# EAGLE board panel (EAGLE 6.2)
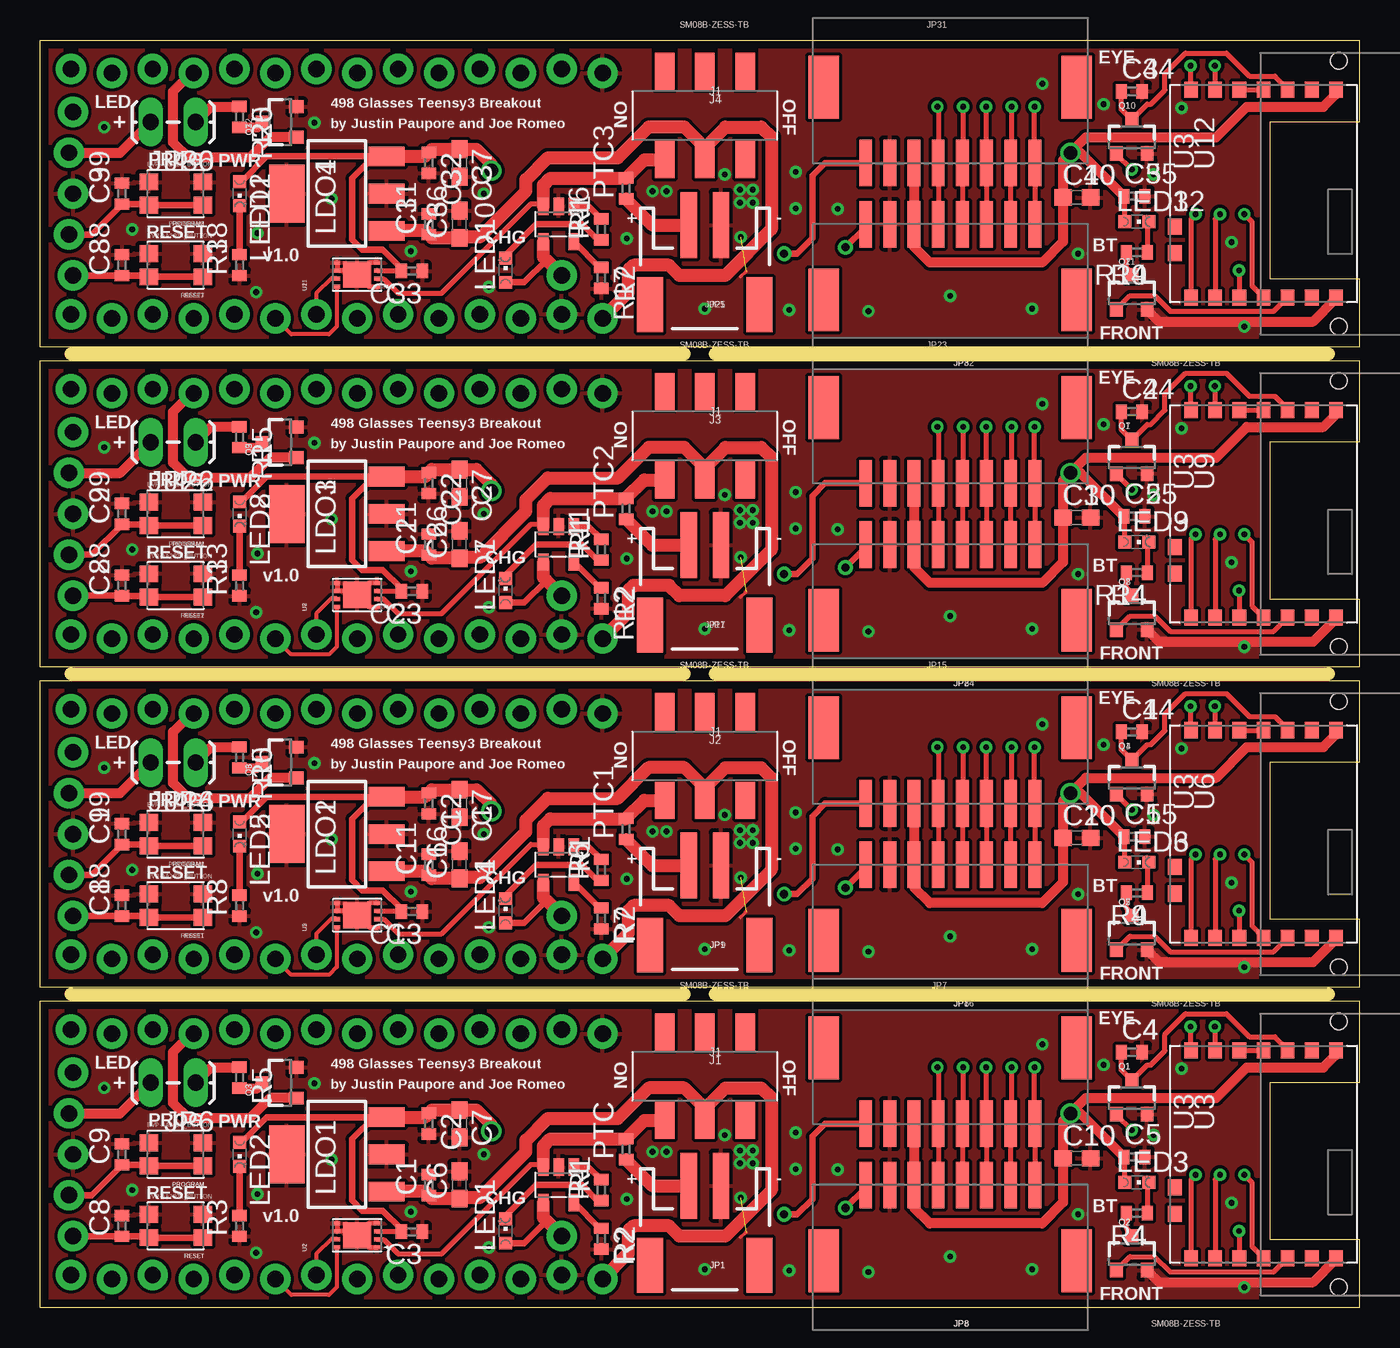
[diagram p0: board, top side]
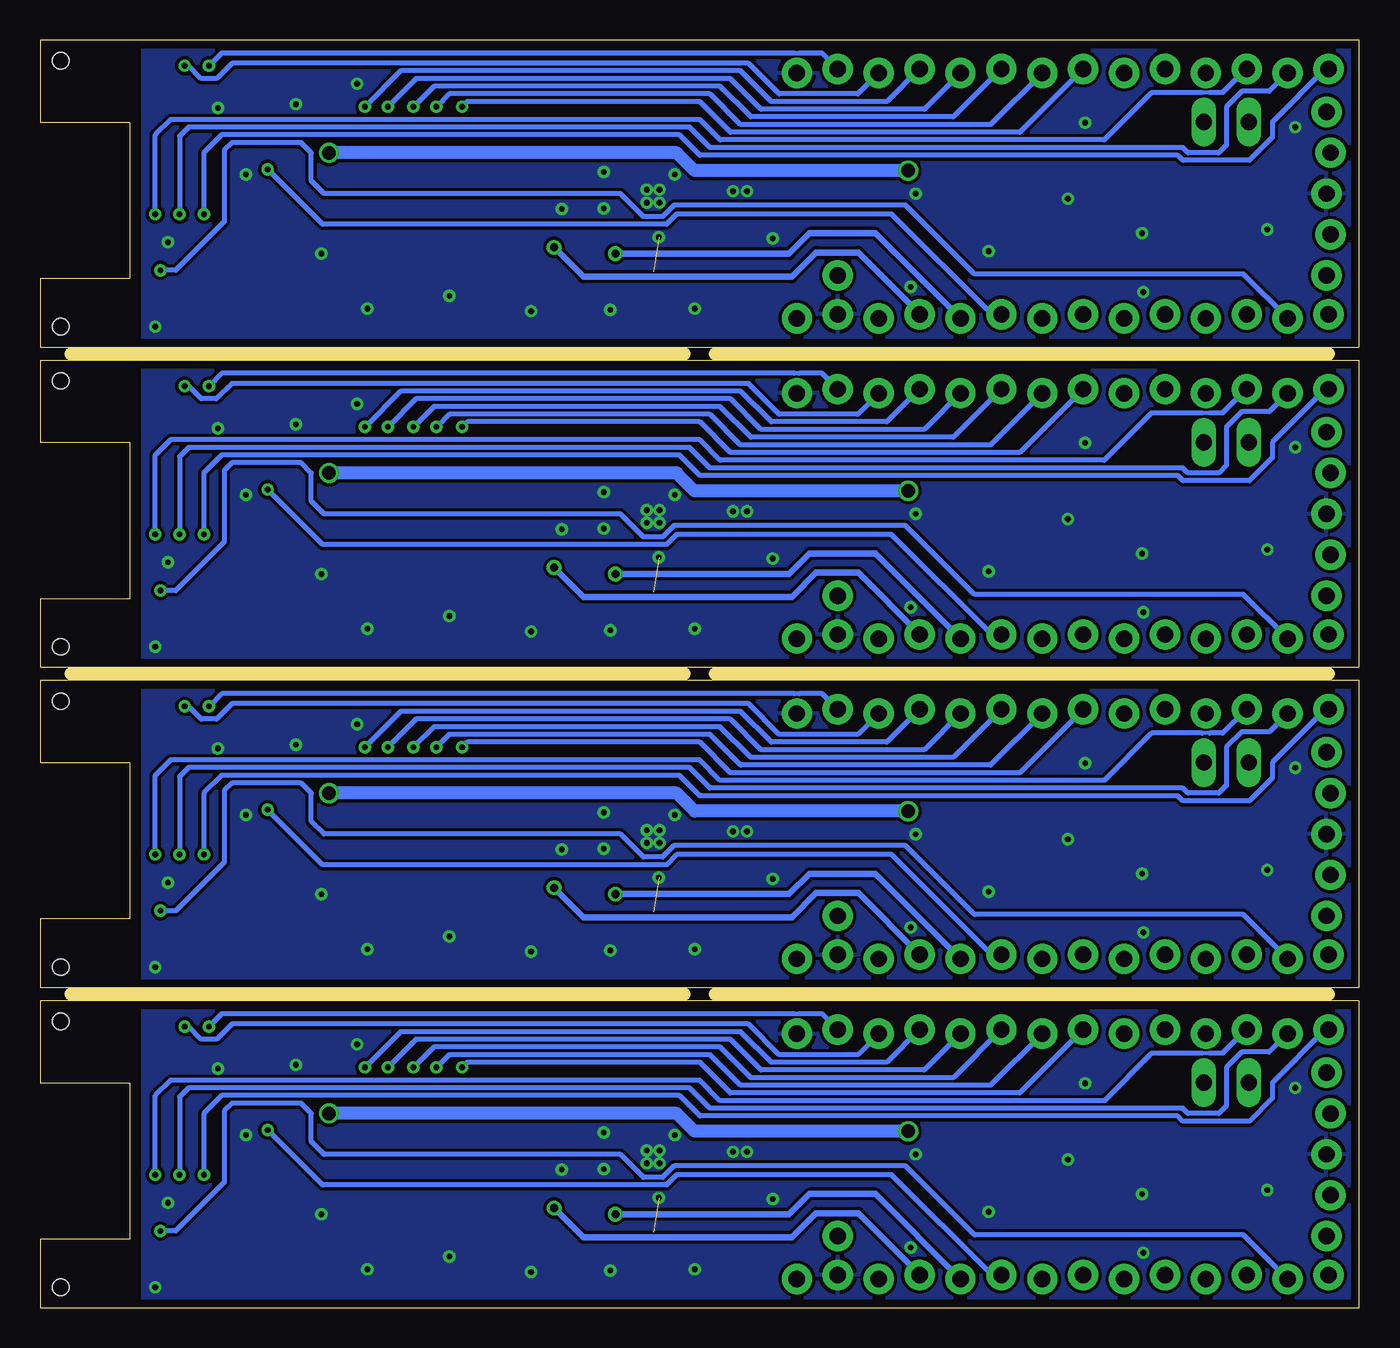
[diagram p1: board, bottom side, seen from below]

Size 81.92 x 78.71 mm. Coordinates in mm from the lower left corner, seen from the top.
Outline: 0,0 0,19.05 81.92,19.05 81.92,13.97 76.36,13.97 76.36,4.25 81.92,4.25 81.92,0 0,0
Outline: 0,19.89 0,38.94 81.92,38.94 81.92,33.86 76.36,33.86 76.36,24.14 81.92,24.14 81.92,19.89 0,19.89
Outline: 0,39.78 0,58.83 81.92,58.83 81.92,53.75 76.36,53.75 76.36,44.02 81.92,44.02 81.92,39.78 0,39.78
Outline: 0,59.66 0,78.72 81.92,78.72 81.92,73.64 76.36,73.64 76.36,63.91 81.92,63.91 81.92,59.66 0,59.66
Copper layers (1*16): Top 0.0178mm / dielectric 59mil / Bottom 0.0178mm
Design rules: minimum track width 6mil, minimum drill 14mil, track to track 6mil, track to pad 6mil, pad to pad 6mil, via to via 6mil, smd to smd 6mil, copper to edge 20mil, drill to drill 16mil, minimum pad ring 8mil, minimum via ring 8mil, stop-mask expansion 1mil, vias tented up to drill 20mil, thermal gap 10mil
Holes 1 mm at 80.64,1.27 80.64,17.78 80.64,21.16 80.64,37.67 80.64,41.05 80.64,57.56 80.64,60.93 80.64,77.44
Milling: 6 lines

## Footprints (pad centres in the part's own frame; a part is rotated, then mirrored left to right if it is on the bottom)
C0402 = smd 0.7 x 0.9: 1 -0.65,0; 2 0.65,0
C0603 = smd 1.1 x 1: 1 -0.85,0; 2 0.85,0
JS2020_6PIN_SMT = smd 1.2 x 2.3: P1 -2.5,1.25; P2 -2.5,-4.25; P3 0,1.25; P4 0,-4.25; P5 2.5,1.25; P6 2.5,-4.25
JST-2-SMD = smd 1 x 4.1: 1 -1,-3.45; 2 1,-3.45 | smd 1.6 x 3.4: NC1 -3.4,1.5; NC2 3.4,1.5
1X14_LOCK = drill 1.016 pad 1.88: 1 0,0.127; 2 2.54,-0.127; 3 5.08,0.127; 4 7.62,-0.127; 5 10.16,0.127; 6 12.7,-0.127; 7 15.24,0.127; 8 17.78,-0.127; 9 20.32,0.127; 10 22.86,-0.127; 11 25.4,0.127; 12 27.94,-0.127; 13 30.48,0.127; 14 33.02,-0.127
1X05_LOCK = drill 1.016 pad 1.88: 1 0,0.127; 2 2.54,-0.127; 3 5.08,0.127; 4 7.62,-0.127; 5 10.16,0.127
1X01 = drill 1.016 pad 1.88: 1 0,0
1X02_LOCK_LONGPADS = drill 1.016 long: 1 -0.127,0; 2 2.667,0
SM08B_8PIN_SMD = smd 1.9 x 3.9: MOUNT1 -7.85,-4.7; MOUNT2 7.85,-4.7 | smd 0.8 x 2.9: P1 -5.25,0; P2 -3.75,0; P3 -2.25,0; P4 -0.75,0; P5 0.75,0; P6 2.25,0; P7 3.75,0; P8 5.25,0
SOT223 = smd 1.219 x 2.235: 1 -2.311,-3.099; 2 0,-3.099; 3 2.311,-3.099 | smd 3.6 x 2.2: 4 0,3.099
CHIPLED_0603 = smd 0.8 x 0.8: A 0,-0.75; C 0,0.75
EVP-AA202K_4PIN = smd 1.15 x 1.05: A -1.675,0.725; A' 1.675,0.725; B -1.675,-0.725; B' 1.675,-0.725
R0402 = smd 0.7 x 0.9: 1 -0.65,0; 2 0.65,0
SOT23-3 = smd 0.8 x 0.9: 1 -0.95,-1; 2 0.95,-1; 3 0,1.1
SOT23-5 = smd 1.06 x 0.65: P1 -0.35,0.95; P2 -0.35,0; P3 -0.35,-0.95; P4 1.85,-0.95; P5 1.85,0.95
TDFN_8PIN = smd 1.63 x 1.75: EP 1,0 | smd 0.25 x 0.4: P1 0.25,-1.25; P2 0.75,-1.25; P3 1.25,-1.25; P4 1.75,-1.25; P5 1.75,1.25; P6 1.25,1.25; P7 0.75,1.25; P8 0.25,1.25
SPBT2632C2A_16PIN_SMD = smd 1 x 0.85: P1 -6.45,-1.3; P2 -6.45,-2.8; P3 -6.45,-4.3; P4 -6.45,-5.8; P5 -6.45,-7.3; P6 -6.45,-8.8; P7 -6.45,-10.3; P8 6.45,-10.3; P9 6.45,-8.8; P10 6.45,-7.3; P11 6.45,-5.8; P12 6.45,-4.3; P13 6.45,-2.8; P14 6.45,-1.3; P15 -2.05,-0.3; P16 -3.7,-0.3

## Placement (x,y rotation side)
C1  1uF  [C0402]  24.13,7.62 90 top
C2  1uF  [C0402]  24.13,11.43 270 top
C3  1uF  [C0402]  23.08,4.71 180 top
C4  0.1uF  [C0402]  67.79,15.88 0 top
C5  1uF  [C0402]  67.94,9.37 0 top
C6  10uF  [C0603]  26.04,7.62 90 top
C7  10uF  [C0603]  26.04,11.43 270 top
C8  0.1uF  [C0402]  5.08,5.08 90 top
C9  0.1uF  [C0402]  5.08,9.53 90 top
C10  10uF  [C0603]  64.37,9.29 0 top
C11  1uF  [C0402]  24.13,27.51 90 top
C12  1uF  [C0402]  24.13,31.32 270 top
C13  1uF  [C0402]  23.08,24.6 180 top
C14  0.1uF  [C0402]  67.79,35.76 0 top
C15  1uF  [C0402]  67.94,29.25 0 top
C16  10uF  [C0603]  26.04,27.51 90 top
C17  10uF  [C0603]  26.04,31.32 270 top
C18  0.1uF  [C0402]  5.08,24.97 90 top
C19  0.1uF  [C0402]  5.08,29.41 90 top
C20  10uF  [C0603]  64.37,29.18 0 top
C21  1uF  [C0402]  24.13,47.4 90 top
C22  1uF  [C0402]  24.13,51.21 270 top
C23  1uF  [C0402]  23.08,44.49 180 top
C24  0.1uF  [C0402]  67.79,55.65 0 top
C25  1uF  [C0402]  67.94,49.14 0 top
C26  10uF  [C0603]  26.04,47.4 90 top
C27  10uF  [C0603]  26.04,51.21 270 top
C28  0.1uF  [C0402]  5.08,44.86 90 top
C29  0.1uF  [C0402]  5.08,49.3 90 top
C30  10uF  [C0603]  64.37,49.06 0 top
C31  1uF  [C0402]  24.13,67.28 90 top
C32  1uF  [C0402]  24.13,71.09 270 top
C33  1uF  [C0402]  23.08,64.38 180 top
C34  0.1uF  [C0402]  67.79,75.54 0 top
C35  1uF  [C0402]  67.94,69.03 0 top
C36  10uF  [C0603]  26.04,67.28 90 top
C37  10uF  [C0603]  26.04,71.09 270 top
C38  0.1uF  [C0402]  5.08,64.74 90 top
C39  0.1uF  [C0402]  5.08,69.19 90 top
C40  10uF  [C0603]  64.37,68.95 0 top
J1  JS202011SCQN  [JS2020_6PIN_SMT]  41.27,15.88 0 top
J2  JS202011SCQN  [JS2020_6PIN_SMT]  41.27,35.76 0 top
J3  JS202011SCQN  [JS2020_6PIN_SMT]  41.27,55.65 0 top
J4  JS202011SCQN  [JS2020_6PIN_SMT]  41.27,75.54 0 top
JP1  [JST-2-SMD]  41.27,4.13 180 top
JP2  M14LOCK  [1X14_LOCK]  1.91,17.14 0 top
JP3  M14LOCK  [1X14_LOCK]  1.91,1.91 0 top
JP4  [1X05_LOCK]  1.91,14.61 270 top
JP5  M01PTH  [1X01]  32.38,4.45 0 top
JP6  LED  [1X02_LOCK_LONGPADS]  9.53,13.97 180 top
JP7  SM08B-ZESS-TB  [SM08B_8PIN_SMD]  56.52,11.43 180 top
JP8  SM08B-ZESS-TB  [SM08B_8PIN_SMD]  56.52,7.62 0 top
JP9  [JST-2-SMD]  41.27,24.02 180 top
JP10  M14LOCK  [1X14_LOCK]  1.91,37.03 0 top
JP11  M14LOCK  [1X14_LOCK]  1.91,21.79 0 top
JP12  [1X05_LOCK]  1.91,34.49 270 top
JP13  M01PTH  [1X01]  32.38,24.33 0 top
JP14  LED  [1X02_LOCK_LONGPADS]  9.53,33.86 180 top
JP15  SM08B-ZESS-TB  [SM08B_8PIN_SMD]  56.52,31.32 180 top
JP16  SM08B-ZESS-TB  [SM08B_8PIN_SMD]  56.52,27.51 0 top
JP17  [JST-2-SMD]  41.27,43.9 180 top
JP18  M14LOCK  [1X14_LOCK]  1.91,56.92 0 top
JP19  M14LOCK  [1X14_LOCK]  1.91,41.68 0 top
JP20  [1X05_LOCK]  1.91,54.38 270 top
JP21  M01PTH  [1X01]  32.38,44.22 0 top
JP22  LED  [1X02_LOCK_LONGPADS]  9.53,53.75 180 top
JP23  SM08B-ZESS-TB  [SM08B_8PIN_SMD]  56.52,51.21 180 top
JP24  SM08B-ZESS-TB  [SM08B_8PIN_SMD]  56.52,47.4 0 top
JP25  [JST-2-SMD]  41.27,63.79 180 top
JP26  M14LOCK  [1X14_LOCK]  1.91,76.81 0 top
JP27  M14LOCK  [1X14_LOCK]  1.91,61.57 0 top
JP28  [1X05_LOCK]  1.91,74.27 270 top
JP29  M01PTH  [1X01]  32.38,64.11 0 top
JP30  LED  [1X02_LOCK_LONGPADS]  9.53,73.63 180 top
JP31  SM08B-ZESS-TB  [SM08B_8PIN_SMD]  56.52,71.09 180 top
JP32  SM08B-ZESS-TB  [SM08B_8PIN_SMD]  56.52,67.28 0 top
LDO1  TC1262  [SOT223]  18.41,9.53 90 top
LDO2  TC1262  [SOT223]  18.41,29.41 90 top
LDO3  TC1262  [SOT223]  18.41,49.3 90 top
LDO4  TC1262  [SOT223]  18.41,69.19 90 top
LED1  RED  [CHIPLED_0603]  28.89,4.76 0 top
LED2  GREEN  [CHIPLED_0603]  12.38,9.53 180 top
LED3  BLUE  [CHIPLED_0603]  68.1,7.78 270 top
LED4  RED  [CHIPLED_0603]  28.89,24.65 0 top
LED5  GREEN  [CHIPLED_0603]  12.38,29.41 180 top
LED6  BLUE  [CHIPLED_0603]  68.1,27.67 270 top
LED7  RED  [CHIPLED_0603]  28.89,44.54 0 top
LED8  GREEN  [CHIPLED_0603]  12.38,49.3 180 top
LED9  BLUE  [CHIPLED_0603]  68.1,47.56 270 top
LED10  RED  [CHIPLED_0603]  28.89,64.43 0 top
LED11  GREEN  [CHIPLED_0603]  12.38,69.19 180 top
LED12  BLUE  [CHIPLED_0603]  68.1,67.44 270 top
PROGRAM  EVP-AA202K_BUTTON  [EVP-AA202K_4PIN]  8.41,9.53 180 top
PROGRAM1  EVP-AA202K_BUTTON  [EVP-AA202K_4PIN]  8.41,29.41 180 top
PROGRAM2  EVP-AA202K_BUTTON  [EVP-AA202K_4PIN]  8.41,49.3 180 top
PROGRAM3  EVP-AA202K_BUTTON  [EVP-AA202K_4PIN]  8.41,69.19 180 top
PTC  500mA  [R0402]  36.39,9.84 90 top
PTC1  500mA  [R0402]  36.39,29.73 90 top
PTC2  500mA  [R0402]  36.39,49.62 90 top
PTC3  500mA  [R0402]  36.39,69.51 90 top
Q1  2N7002  [SOT23-3]  67.79,13.02 0 top
Q2  2N7002  [SOT23-3]  67.79,3.33 0 top
Q3  2N7002  [SOT23-3]  14.92,13.97 90 top
Q4  2N7002  [SOT23-3]  67.79,32.91 0 top
Q5  2N7002  [SOT23-3]  67.79,23.22 0 top
Q6  2N7002  [SOT23-3]  14.92,33.86 90 top
Q7  2N7002  [SOT23-3]  67.79,52.79 0 top
Q8  2N7002  [SOT23-3]  67.79,43.11 0 top
Q9  2N7002  [SOT23-3]  14.92,53.75 90 top
Q10  2N7002  [SOT23-3]  67.79,72.68 0 top
Q11  2N7002  [SOT23-3]  67.79,63 0 top
Q12  2N7002  [SOT23-3]  14.92,73.63 90 top
R1  150  [R0402]  34.85,7.3 90 top
R2  4.7K  [R0402]  34.85,4.29 270 top
R3  56  [R0402]  12.38,5.08 90 top
R4  56  [R0402]  68.1,5.87 180 top
R5  DNI  [R0402]  12.38,14.29 270 top
R6  150  [R0402]  34.85,27.19 90 top
R7  4.7K  [R0402]  34.85,24.17 270 top
R8  56  [R0402]  12.38,24.97 90 top
R9  56  [R0402]  68.1,25.76 180 top
R10  DNI  [R0402]  12.38,34.18 270 top
R11  150  [R0402]  34.85,47.08 90 top
R12  4.7K  [R0402]  34.85,44.06 270 top
R13  56  [R0402]  12.38,44.86 90 top
R14  56  [R0402]  68.1,45.65 180 top
R15  DNI  [R0402]  12.38,54.06 270 top
R16  150  [R0402]  34.85,66.97 90 top
R17  4.7K  [R0402]  34.85,63.95 270 top
R18  56  [R0402]  12.38,64.74 90 top
R19  56  [R0402]  68.1,65.54 180 top
R20  DNI  [R0402]  12.38,73.95 270 top
RESET  EVP-AA202K_BUTTON  [EVP-AA202K_4PIN]  8.41,5.08 180 top
RESET1  EVP-AA202K_BUTTON  [EVP-AA202K_4PIN]  8.41,24.97 180 top
RESET2  EVP-AA202K_BUTTON  [EVP-AA202K_4PIN]  8.41,44.86 180 top
RESET3  EVP-AA202K_BUTTON  [EVP-AA202K_4PIN]  8.41,64.74 180 top
U1  MCP73831-SOT5  [SOT23-5]  32.19,8.38 270 top
U2  MAX17040-TDFN  [TDFN_8PIN]  19.68,3.49 90 top
U3  SPBT2632C2A  [SPBT2632C2A_16PIN_SMD]  70.17,9.53 90 top
U4  MCP73831-SOT5  [SOT23-5]  32.19,28.27 270 top
U5  MAX17040-TDFN  [TDFN_8PIN]  19.68,23.38 90 top
U6  SPBT2632C2A  [SPBT2632C2A_16PIN_SMD]  70.17,29.41 90 top
U7  MCP73831-SOT5  [SOT23-5]  32.19,48.16 270 top
U8  MAX17040-TDFN  [TDFN_8PIN]  19.68,43.27 90 top
U9  SPBT2632C2A  [SPBT2632C2A_16PIN_SMD]  70.17,49.3 90 top
U10  MCP73831-SOT5  [SOT23-5]  32.19,68.05 270 top
U11  MAX17040-TDFN  [TDFN_8PIN]  19.68,63.16 90 top
U12  SPBT2632C2A  [SPBT2632C2A_16PIN_SMD]  70.17,69.19 90 top

## Library data of the parts
C1-C40 PTC PTC1-PTC3 R1-R20 = resistor
J1-J4 JP7 JP8 JP15 JP16 JP23 JP24 JP31 JP32 LDO1-LDO4 PROGRAM PROGRAM1-PROGRAM3 RESET RESET1-RESET3 U1-U12 = glasses
JP1-JP6 JP9-JP14 JP17-JP22 JP25-JP30 Q1-Q12 = SparkFun
LED1-LED12 = led

## Nets
+3V1: JP12.2 JP14.2
+3V2: JP20.2 JP22.2
+3V3: JP4.2 JP6.2
+3V4: JP28.2 JP30.2
BT_RESET: JP3.9 Q1.1
BT_RESET1: JP11.9 Q4.1
BT_RESET2: JP19.9 Q7.1
BT_RESET3: JP27.9 Q10.1
GND: C1.2 C2.2 C3.1 C4.2 C5.2 C6.2 C7.2 C8.2 C9.2 C10.2 JP1.1 JP2.14 JP3.13 JP4.3 JP7.P7 JP8.P2 LDO1.2 LDO1.4 PROGRAM.B PROGRAM.B' Q1.2 Q2.2 Q3.2 R2.2 R3.1 RESET.B RESET.B' U1.P2 U2.EP U2.P1 U2.P4 U2.P5 U2.P6 U3.P7
GND1: C11.2 C12.2 C13.1 C14.2 C15.2 C16.2 C17.2 C18.2 C19.2 C20.2 JP9.1 JP10.14 JP11.13 JP12.3 JP15.P7 JP16.P2 LDO2.2 LDO2.4 PROGRAM1.B PROGRAM1.B' Q4.2 Q5.2 Q6.2 R7.2 R8.1 RESET1.B RESET1.B' U4.P2 U5.EP U5.P1 U5.P4 U5.P5 U5.P6 U6.P7
GND2: C21.2 C22.2 C23.1 C24.2 C25.2 C26.2 C27.2 C28.2 C29.2 C30.2 JP17.1 JP18.14 JP19.13 JP20.3 JP23.P7 JP24.P2 LDO3.2 LDO3.4 PROGRAM2.B PROGRAM2.B' Q7.2 Q8.2 Q9.2 R12.2 R13.1 RESET2.B RESET2.B' U7.P2 U8.EP U8.P1 U8.P4 U8.P5 U8.P6 U9.P7
GND3: C31.2 C32.2 C33.1 C34.2 C35.2 C36.2 C37.2 C38.2 C39.2 C40.2 JP25.1 JP26.14 JP27.13 JP28.3 JP31.P7 JP32.P2 LDO4.2 LDO4.4 PROGRAM3.B PROGRAM3.B' Q10.2 Q11.2 Q12.2 R17.2 R18.1 RESET3.B RESET3.B' U10.P2 U11.EP U11.P1 U11.P4 U11.P5 U11.P6 U12.P7
I2C_SCL: JP3.7 U2.P7
I2C_SCL1: JP11.7 U5.P7
I2C_SCL2: JP19.7 U8.P7
I2C_SCL3: JP27.7 U11.P7
I2C_SDA: JP3.6 U2.P8
I2C_SDA1: JP11.6 U5.P8
I2C_SDA2: JP19.6 U8.P8
I2C_SDA3: JP27.6 U11.P8
INCP: JP2.10 JP7.P2 JP8.P7
INCP1: JP10.10 JP15.P2 JP16.P7
INCP2: JP18.10 JP23.P2 JP24.P7
INCP3: JP26.10 JP31.P2 JP32.P7
INCV: JP2.8 JP7.P4 JP8.P5
INCV1: JP10.8 JP15.P4 JP16.P5
INCV2: JP18.8 JP23.P4 JP24.P5
INCV3: JP26.8 JP31.P4 JP32.P5
INPHI: JP2.7 JP7.P5 JP8.P4
INPHI1: JP10.7 JP15.P5 JP16.P4
INPHI2: JP18.7 JP23.P5 JP24.P4
INPHI3: JP26.7 JP31.P5 JP32.P4
IR_LED: JP2.4 Q3.1
IR_LED1: JP10.4 Q6.1
IR_LED2: JP18.4 Q9.1
IR_LED3: JP26.4 Q12.1
N$1: LED1.C R1.1
N$2: R1.2 U1.P1
N$3: R2.1 U1.P5
N$4: JP1.2 PTC.1
N$5: LED2.C R3.2
N$6: U3.P11 U3.P12
N$7: C4.1 Q1.3 U3.P10
N$8: Q2.1 U3.P5
N$9: LED3.C R4.1
N$10: Q2.3 R4.2
N$11: JP6.1 R5.1
N$12: Q3.3 R5.2
N$13: U6.P11 U6.P12
N$14: C14.1 Q4.3 U6.P10
N$15: Q5.1 U6.P5
N$16: LED6.C R9.1
N$17: Q5.3 R9.2
N$18: JP14.1 R10.1
N$19: Q6.3 R10.2
N$20: R6.2 U4.P1
N$21: R7.1 U4.P5
N$22: JP9.2 PTC1.1
N$23: LED5.C R8.2
N$24: LED4.C R6.1
N$25: U9.P11 U9.P12
N$26: C24.1 Q7.3 U9.P10
N$27: Q8.1 U9.P5
N$28: LED9.C R14.1
N$29: Q8.3 R14.2
N$30: JP22.1 R15.1
N$31: Q9.3 R15.2
N$32: R11.2 U7.P1
N$33: R12.1 U7.P5
N$34: JP17.2 PTC2.1
N$35: LED8.C R13.2
N$36: LED7.C R11.1
N$37: U12.P11 U12.P12
N$38: C34.1 Q10.3 U12.P10
N$39: Q11.1 U12.P5
N$40: LED12.C R19.1
N$41: Q11.3 R19.2
N$42: JP30.1 R20.1
N$43: Q12.3 R20.2
N$44: R16.2 U10.P1
N$45: R17.1 U10.P5
N$46: JP25.2 PTC3.1
N$47: LED11.C R18.2
N$48: LED10.C R16.1
PIXEL_EYE: JP3.10 JP7.P8
PIXEL_EYE1: JP11.10 JP15.P8
PIXEL_EYE2: JP19.10 JP23.P8
PIXEL_EYE3: JP27.10 JP31.P8
PIXEL_FRONT: JP3.11 JP8.P1
PIXEL_FRONT1: JP11.11 JP16.P1
PIXEL_FRONT2: JP19.11 JP24.P1
PIXEL_FRONT3: JP27.11 JP32.P1
RESP: JP2.11 JP7.P1 JP8.P8
RESP1: JP10.11 JP15.P1 JP16.P8
RESP2: JP18.11 JP23.P1 JP24.P8
RESP3: JP26.11 JP31.P1 JP32.P8
RESV: JP2.9 JP7.P3 JP8.P6
RESV1: JP10.9 JP15.P3 JP16.P6
RESV2: JP18.9 JP23.P3 JP24.P6
RESV3: JP26.9 JP31.P3 JP32.P6
SPI_CS: JP2.3 U3.P4
SPI_CS1: JP10.3 U6.P4
SPI_CS2: JP18.3 U9.P4
SPI_CS3: JP26.3 U12.P4
SPI_MISO: JP2.1 U3.P1
SPI_MISO1: JP10.1 U6.P1
SPI_MISO2: JP18.1 U9.P1
SPI_MISO3: JP26.1 U12.P1
SPI_MOSI: JP2.2 U3.P2
SPI_MOSI1: JP10.2 U6.P2
SPI_MOSI2: JP18.2 U9.P2
SPI_MOSI3: JP26.2 U12.P2
SPI_SCK: JP3.2 U3.P3
SPI_SCK1: JP11.2 U6.P3
SPI_SCK2: JP19.2 U9.P3
SPI_SCK3: JP27.2 U12.P3
TS_GP1: JP10.6
TS_GP2: JP10.5
TS_GP3: JP11.8
TS_GP4: JP11.5
TS_GP5: JP11.3
TS_GP6: JP11.1
TS_GP7: JP2.6
TS_GP8: JP2.5
TS_GP9: JP11.4
TS_GP10: JP18.6
TS_GP11: JP18.5
TS_GP12: JP19.8
TS_GP13: JP3.1
TS_GP14: JP19.5
TS_GP15: JP3.3
TS_GP16: JP3.4
TS_GP17: JP3.5
TS_GP18: JP19.3
TS_GP19: JP19.1
TS_GP20: JP3.8
TS_GP21: JP19.4
TS_GP22: JP26.6
TS_GP23: JP26.5
TS_GP24: JP27.8
TS_GP25: JP27.5
TS_GP26: JP27.3
TS_GP27: JP27.1
TS_GP28: JP27.4
TS_PROG: C9.1 JP4.4 PROGRAM.A PROGRAM.A'
TS_PROG1: C19.1 JP12.4 PROGRAM1.A PROGRAM1.A'
TS_PROG2: C29.1 JP20.4 PROGRAM2.A PROGRAM2.A'
TS_PROG3: C39.1 JP28.4 PROGRAM3.A PROGRAM3.A'
TS_RESET: C8.1 JP4.5 RESET.A RESET.A'
TS_RESET1: C18.1 JP12.5 RESET1.A RESET1.A'
TS_RESET2: C28.1 JP20.5 RESET2.A RESET2.A'
TS_RESET3: C38.1 JP28.5 RESET3.A RESET3.A'
TS_VBAT: JP4.1
TS_VBAT1: JP12.1
TS_VBAT2: JP20.1
TS_VBAT3: JP28.1
UART1_RXD: JP2.13 U3.P14
UART1_RXD1: JP10.13 U6.P14
UART1_RXD2: JP18.13 U9.P14
UART1_RXD3: JP26.13 U12.P14
UART1_TXD: JP2.12 U3.P13
UART1_TXD1: JP10.12 U6.P13
UART1_TXD2: JP18.12 U9.P13
UART1_TXD3: JP26.12 U12.P13
VBAT: J1.P2 PTC.2 U1.P3 U2.P2
VBAT1: J2.P2 PTC1.2 U4.P3 U5.P2
VBAT2: J3.P2 PTC2.2 U7.P3 U8.P2
VBAT3: J4.P2 PTC3.2 U10.P3 U11.P2
VCC: JP3.12
VCC1: JP11.12
VCC2: JP19.12
VCC3: JP27.12
VCCIO: C2.1 C3.2 C5.1 C7.1 C10.1 JP7.P6 JP8.P3 LDO1.3 LED2.A LED3.A U2.P3 U3.P8
VCCIO1: C12.1 C13.2 C15.1 C17.1 C20.1 JP15.P6 JP16.P3 LDO2.3 LED5.A LED6.A U5.P3 U6.P8
VCCIO2: C22.1 C23.2 C25.1 C27.1 C30.1 JP23.P6 JP24.P3 LDO3.3 LED8.A LED9.A U8.P3 U9.P8
VCCIO3: C32.1 C33.2 C35.1 C37.1 C40.1 JP31.P6 JP32.P3 LDO4.3 LED11.A LED12.A U11.P3 U12.P8
VIN: C1.1 C6.1 J1.P4 JP3.14 LDO1.1
VIN1: C11.1 C16.1 J2.P4 JP11.14 LDO2.1
VIN2: C21.1 C26.1 J3.P4 JP19.14 LDO3.1
VIN3: C31.1 C36.1 J4.P4 JP27.14 LDO4.1
VUSB: JP5.1 LED1.A U1.P4
VUSB1: JP13.1 LED4.A U4.P4
VUSB2: JP21.1 LED7.A U7.P4
VUSB3: JP29.1 LED10.A U10.P4

## Tracks (layer width: path | path; a pad name or v marks a point on that pad's centre or on a via)
+3V1
  Top 0.61: JP12.2 4.95,31.95 JP14.2
+3V2
  Top 0.61: JP20.2 4.95,51.84 JP22.2
+3V3
  Top 0.61: JP4.2 4.95,12.06 JP6.2
+3V4
  Top 0.61: JP28.2 4.95,71.73 JP30.2
BT_RESET  (via drill 0.36)
  Top 0.305: Q1.1 66.84,11.98 v67.79,11.03
  Bottom 0.305: JP3.9 22.83,2.03 29.05,8.26 42.39,8.26 43.02,7.62 64.37,7.62 v67.79,11.03
BT_RESET1  (via drill 0.36)
  Top 0.305: Q4.1 66.84,31.87 v67.79,30.92
  Bottom 0.305: JP11.9 22.83,21.92 29.05,28.14 42.39,28.14 43.02,27.51 64.37,27.51 v67.79,30.92
BT_RESET2  (via drill 0.36)
  Top 0.305: Q7.1 66.84,51.76 v67.79,50.81
  Bottom 0.305: JP19.9 22.83,41.81 29.05,48.03 42.39,48.03 43.02,47.4 64.37,47.4 v67.79,50.81
BT_RESET3  (via drill 0.36)
  Top 0.305: Q10.1 66.84,71.65 v67.79,70.7
  Bottom 0.305: JP27.9 22.83,61.7 29.05,67.92 42.39,67.92 43.02,67.28 64.37,67.28 v67.79,70.7
GND  (via drill 0.36)  (1 unrouted)
  Top 0.229: 43.5,4.37 43.81,4.68
  Top 0.305: U2.EP 19.68,4.74 U2.P6 U2.P5 | U2.P4 20.43,5.24 U2.EP | U2.EP 20.43,3.74 U2.P1
  Top 0.406: 80.47,3 U3.P7
  Top 0.61: Q2.2 69.48,1.59 79.06,1.59 80.47,3
  other vias: 43.5,6.83 23.02,5.95 27.54,9.53 36.43,6.75 56.52,3.17 61.59,2.38 51.44,2.22 13.49,7.06 18.1,9.21 3.97,13.65 5.71,7.3 38.89,9.68 70.88,14.84 13.41,3.41 27.86,3.73 46.91,10.87 46.91,8.61 46.51,2.3 41.27,2.38 62.23,16.35 66.04,15.08 43.46,9.76 44.25,9.76 43.46,8.97 44.25,8.97 42.51,10.72 17.03,13.93 64.45,5.79 74.77,1.27 69.14,10.72 73.98,6.51 38.02,9.68 49.53,8.57
  pour Bottom (isolate 0.203): 0,0 0,19.05 75.56,19.05 75.56,0
  pour Top (isolate 0.203, rank 6): 0,0 0,19.05 75.56,19.05 75.56,0
GND1  (via drill 0.36)  (1 unrouted)
  Top 0.229: 43.5,24.25 43.81,24.57
  Top 0.305: U5.EP 19.68,24.63 U5.P6 U5.P5 | U5.P4 20.43,25.13 U5.EP | U5.EP 20.43,23.63 U5.P1
  Top 0.406: 80.47,22.89 U6.P7
  Top 0.61: Q5.2 69.48,21.48 79.06,21.48 80.47,22.89
  other vias: 43.5,26.71 23.02,25.84 27.54,29.41 36.43,26.64 56.52,23.06 61.59,22.27 51.44,22.11 13.49,26.95 18.1,29.1 3.97,33.54 5.71,27.19 38.89,29.57 70.88,34.73 13.41,23.3 27.86,23.62 46.91,30.76 46.91,28.5 46.51,22.19 41.27,22.27 62.23,36.24 66.04,34.97 43.46,29.65 44.25,29.65 43.46,28.86 44.25,28.86 42.51,30.6 17.03,33.82 64.45,25.68 74.77,21.16 69.14,30.6 73.98,26.4 38.02,29.57 49.53,28.46
  pour Bottom (isolate 0.203): 0,19.89 0,38.94 75.56,38.94 75.56,19.89
  pour Top (isolate 0.203, rank 6): 0,19.89 0,38.94 75.56,38.94 75.56,19.89
GND2  (via drill 0.36)  (1 unrouted)
  Top 0.229: 43.5,44.14 43.81,44.46
  Top 0.305: U8.EP 19.68,44.52 U8.P6 U8.P5 | U8.P4 20.43,45.02 U8.EP | U8.EP 20.43,43.52 U8.P1
  Top 0.406: 80.47,42.77 U9.P7
  Top 0.61: Q8.2 69.48,41.36 79.06,41.36 80.47,42.77
  other vias: 43.5,46.6 23.02,45.73 27.54,49.3 36.43,46.52 56.52,42.95 61.59,42.16 51.44,42 13.49,46.84 18.1,48.98 3.97,53.43 5.71,47.08 38.89,49.46 70.88,54.62 13.41,43.19 27.86,43.51 46.91,50.65 46.91,48.39 46.51,42.08 41.27,42.16 62.23,56.13 66.04,54.86 43.46,49.54 44.25,49.54 43.46,48.75 44.25,48.75 42.51,50.49 17.03,53.71 64.45,45.57 74.77,41.05 69.14,50.49 73.98,46.29 38.02,49.46 49.53,48.35
  pour Bottom (isolate 0.203): 0,39.78 0,58.83 75.56,58.83 75.56,39.78
  pour Top (isolate 0.203, rank 6): 0,39.78 0,58.83 75.56,58.83 75.56,39.78
GND3  (via drill 0.36)  (1 unrouted)
  Top 0.229: 43.5,64.03 43.81,64.35
  Top 0.305: U11.EP 19.68,64.41 U11.P6 U11.P5 | U11.P4 20.43,64.91 U11.EP | U11.EP 20.43,63.41 U11.P1
  Top 0.406: 80.47,62.66 U12.P7
  Top 0.61: Q11.2 69.48,61.25 79.06,61.25 80.47,62.66
  other vias: 43.5,66.49 23.02,65.62 27.54,69.19 36.43,66.41 56.52,62.84 61.59,62.05 51.44,61.89 13.49,66.73 18.1,68.87 3.97,73.32 5.71,66.97 38.89,69.35 70.88,74.51 13.41,63.08 27.86,63.4 46.91,70.54 46.91,68.28 46.51,61.97 41.27,62.05 62.23,76.02 66.04,74.75 43.46,69.43 44.25,69.43 43.46,68.63 44.25,68.63 42.51,70.38 17.03,73.59 64.45,65.46 74.77,60.93 69.14,70.38 73.98,66.17 38.02,69.35 49.53,68.24
  pour Bottom (isolate 0.203): 0,59.66 0,78.71 75.56,78.71 75.56,59.66
  pour Top (isolate 0.203, rank 6): 0,59.66 0,78.71 75.56,78.71 75.56,59.66
I2C_SCL
  Top 0.254: U2.P7 18.39,4.29 18.1,4.29 17.14,3.33 JP3.7
I2C_SCL1
  Top 0.254: U5.P7 18.39,24.17 18.1,24.17 17.14,23.22 JP11.7
I2C_SCL2
  Top 0.254: U8.P7 18.39,44.06 18.1,44.06 17.14,43.11 JP19.7
I2C_SCL3
  Top 0.254: U11.P7 18.39,63.95 18.1,63.95 17.14,63 JP27.7
I2C_SDA
  Top 0.254: U2.P8 18.41,3.72 18.41,1.27 17.94,0.79 15.59,0.79 JP3.6
I2C_SDA1
  Top 0.254: U5.P8 18.41,23.61 18.41,21.16 17.94,20.68 15.59,20.68 JP11.6
I2C_SDA2
  Top 0.254: U8.P8 18.41,43.5 18.41,41.05 17.94,40.57 15.59,40.57 JP19.6
I2C_SDA3
  Top 0.254: U11.P8 18.41,63.39 18.41,60.94 17.94,60.46 15.59,60.46 JP27.6
INCP  (via drill 0.36)
  Top 0.305: JP8.P7 JP7.P2 60.33,11.43 v60.33,14.92
  Bottom 0.305: JP2.10 27.02,14.76 37.15,14.76 39.05,16.67 58.58,16.67 v60.33,14.92
INCP1  (via drill 0.36)
  Top 0.305: JP16.P7 JP15.P2 60.33,31.32 v60.33,34.81
  Bottom 0.305: JP10.10 27.02,34.65 37.15,34.65 39.05,36.56 58.58,36.56 v60.33,34.81
INCP2  (via drill 0.36)
  Top 0.305: JP24.P7 JP23.P2 60.33,51.21 v60.33,54.7
  Bottom 0.305: JP18.10 27.02,54.54 37.15,54.54 39.05,56.45 58.58,56.45 v60.33,54.7
INCP3  (via drill 0.36)
  Top 0.305: JP32.P7 JP31.P2 60.33,71.09 v60.33,74.59
  Bottom 0.305: JP26.10 27.02,74.43 37.15,74.43 39.05,76.33 58.58,76.33 v60.33,74.59
INCV  (via drill 0.36)
  Top 0.305: JP8.P5 JP7.P4 57.31,11.47 v57.31,14.92
  Bottom 0.305: JP2.8 22.89,13.81 38.42,13.81 40.32,15.72 56.52,15.72 v57.31,14.92
INCV1  (via drill 0.36)
  Top 0.305: JP16.P5 JP15.P4 57.31,31.36 v57.31,34.81
  Bottom 0.305: JP10.8 22.89,33.7 38.42,33.7 40.32,35.6 56.52,35.6 v57.31,34.81
INCV2  (via drill 0.36)
  Top 0.305: JP24.P5 JP23.P4 57.31,51.25 v57.31,54.7
  Bottom 0.305: JP18.8 22.89,53.59 38.42,53.59 40.32,55.49 56.52,55.49 v57.31,54.7
INCV3  (via drill 0.36)
  Top 0.305: JP32.P5 JP31.P4 57.31,71.14 v57.31,74.59
  Bottom 0.305: JP26.8 22.89,73.48 38.42,73.48 40.32,75.38 56.52,75.38 v57.31,74.59
INPHI  (via drill 0.36)
  Top 0.305: JP8.P4 JP7.P5 55.77,14.88 v55.72,14.92
  Bottom 0.305: JP2.7 21.08,13.34 39.05,13.34 40.96,15.24 55.4,15.24 v55.72,14.92
INPHI1  (via drill 0.36)
  Top 0.305: JP16.P4 JP15.P5 55.77,34.77 v55.72,34.81
  Bottom 0.305: JP10.7 21.08,33.22 39.05,33.22 40.96,35.13 55.4,35.13 v55.72,34.81
INPHI2  (via drill 0.36)
  Top 0.305: JP24.P4 JP23.P5 55.77,54.66 v55.72,54.7
  Bottom 0.305: JP18.7 21.08,53.11 39.05,53.11 40.96,55.02 55.4,55.02 v55.72,54.7
INPHI3  (via drill 0.36)
  Top 0.305: JP32.P4 JP31.P5 55.77,74.54 v55.72,74.59
  Bottom 0.305: JP26.7 21.08,73 39.05,73 40.96,74.91 55.4,74.91 v55.72,74.59
IR_LED
  Top 0.61: Q3.1 14.29,13.02 13.02,11.75 9.21,11.75 8.26,12.7 8.26,15.88 9.4,17.02 JP2.4
IR_LED1
  Top 0.61: Q6.1 14.29,32.91 13.02,31.64 9.21,31.64 8.26,32.59 8.26,35.76 9.4,36.91 JP10.4
IR_LED2
  Top 0.61: Q9.1 14.29,52.8 13.02,51.52 9.21,51.52 8.26,52.48 8.26,55.65 9.4,56.79 JP18.4
IR_LED3
  Top 0.61: Q12.1 14.29,72.69 13.02,71.41 9.21,71.41 8.26,72.36 8.26,75.54 9.4,76.68 JP26.4
N$1
  Top 0.406: LED1.C 28.89,5.71 30.8,7.62 33.66,7.62 34.62,6.65 R1.1
N$2
  Top 0.406: R1.2 34.07,8.73 U1.P1
N$3
  Top 0.406: U1.P5 34.74,4.94 R2.1
N$4
  Top 0.813: PTC.1 38,7.58 JP1.2
N$5
  Top 0.406: LED2.C R3.2
N$6
  Top 0.305: U3.P12 U3.P11
N$7
  Top 0.305: C4.1 67.14,14.77 Q1.3 68.75,15.08 68.98,15.08 69.85,15.95 69.85,16.99 71.12,18.26 73.66,18.26 75.09,16.83 76.68,16.83 77.47,16.04 U3.P10
N$8
  Top 0.305: Q2.1 67.68,3.17 69.22,3.17 70.17,2.22 76.6,2.22 77.45,3.08 U3.P5
N$9
  Top 0.305: LED3.C 68.75,7.68 R4.1
N$10
  Top 0.305: Q2.3 67.79,4.6 67.45,4.94 R4.2
N$11
  Top 0.61: JP6.1 10.62,14.94 R5.1
N$12
  Top 0.61: R5.2 13.49,13.64 Q3.3
N$13
  Top 0.305: U6.P12 U6.P11
N$14
  Top 0.305: C14.1 67.14,34.66 Q4.3 68.75,34.97 68.98,34.97 69.85,35.84 69.85,36.87 71.12,38.14 73.66,38.14 75.09,36.72 76.68,36.72 77.47,35.92 U6.P10
N$15
  Top 0.305: Q5.1 67.68,23.06 69.22,23.06 70.17,22.11 76.6,22.11 77.45,22.96 U6.P5
N$16
  Top 0.305: LED6.C 68.75,27.57 R9.1
N$17
  Top 0.305: Q5.3 67.79,24.49 67.45,24.82 R9.2
N$18
  Top 0.61: JP14.1 10.62,34.83 R10.1
N$19
  Top 0.61: R10.2 13.49,33.53 Q6.3
N$20
  Top 0.406: R6.2 34.07,28.62 U4.P1
N$21
  Top 0.406: U4.P5 34.74,24.82 R7.1
N$22
  Top 0.813: PTC1.1 38,27.47 JP9.2
N$23
  Top 0.406: LED5.C R8.2
N$24
  Top 0.406: LED4.C 28.89,25.6 30.8,27.51 33.66,27.51 34.62,26.54 R6.1
N$25
  Top 0.305: U9.P12 U9.P11
N$26
  Top 0.305: C24.1 67.14,54.54 Q7.3 68.75,54.86 68.98,54.86 69.85,55.73 69.85,56.76 71.12,58.03 73.66,58.03 75.09,56.6 76.68,56.6 77.47,55.81 U9.P10
N$27
  Top 0.305: Q8.1 67.68,42.95 69.22,42.95 70.17,42 76.6,42 77.45,42.85 U9.P5
N$28
  Top 0.305: LED9.C 68.75,47.45 R14.1
N$29
  Top 0.305: Q8.3 67.79,44.38 67.45,44.71 R14.2
N$30
  Top 0.61: JP22.1 10.62,54.71 R15.1
N$31
  Top 0.61: R15.2 13.49,53.41 Q9.3
N$32
  Top 0.406: R11.2 34.07,48.51 U7.P1
N$33
  Top 0.406: U7.P5 34.74,44.71 R12.1
N$34
  Top 0.813: PTC2.1 38,47.35 JP17.2
N$35
  Top 0.406: LED8.C R13.2
N$36
  Top 0.406: LED7.C 28.89,45.49 30.8,47.4 33.66,47.4 34.62,46.43 R11.1
N$37
  Top 0.305: U12.P12 U12.P11
N$38
  Top 0.305: C34.1 67.14,74.43 Q10.3 68.75,74.75 68.98,74.75 69.85,75.62 69.85,76.65 71.12,77.92 73.66,77.92 75.09,76.49 76.68,76.49 77.47,75.7 U12.P10
N$39
  Top 0.305: Q11.1 67.68,62.84 69.22,62.84 70.17,61.89 76.6,61.89 77.45,62.74 U12.P5
N$40
  Top 0.305: LED12.C 68.75,67.34 R19.1
N$41
  Top 0.305: Q11.3 67.79,64.27 67.45,64.6 R19.2
N$42
  Top 0.61: JP30.1 10.62,74.6 R20.1
N$43
  Top 0.61: R20.2 13.49,73.3 Q12.3
N$44
  Top 0.406: R16.2 34.07,68.4 U10.P1
N$45
  Top 0.406: U10.P5 34.74,64.6 R17.1
N$46
  Top 0.813: PTC3.1 38,67.24 JP25.2
N$47
  Top 0.406: LED11.C R18.2
N$48
  Top 0.406: LED10.C 28.89,65.38 30.8,67.28 33.66,67.28 34.62,66.32 R16.1
PIXEL_EYE  (via drill 0.51)
  Top 0.406: JP7.P8 48.74,11.43 47.94,10.64 47.94,6.75 46.99,5.79 v46.2,5.79
  Bottom 0.406: JP3.10 30.05,7.06 34.13,7.06 35.4,5.79 v46.2,5.79
PIXEL_EYE1  (via drill 0.51)
  Top 0.406: JP15.P8 48.74,31.32 47.94,30.52 47.94,26.64 46.99,25.68 v46.2,25.68
  Bottom 0.406: JP11.10 30.05,26.95 34.13,26.95 35.4,25.68 v46.2,25.68
PIXEL_EYE2  (via drill 0.51)
  Top 0.406: JP23.P8 48.74,51.21 47.94,50.41 47.94,46.52 46.99,45.57 v46.2,45.57
  Bottom 0.406: JP19.10 30.05,46.84 34.13,46.84 35.4,45.57 v46.2,45.57
PIXEL_EYE3  (via drill 0.51)
  Top 0.406: JP31.P8 48.74,71.09 47.94,70.3 47.94,66.41 46.99,65.46 v46.2,65.46
  Bottom 0.406: JP27.10 30.05,66.73 34.13,66.73 35.4,65.46 v46.2,65.46
PIXEL_FRONT  (via drill 0.51)
  Top 0.406: JP8.P1 51.27,7.45 v50.01,6.19
  Bottom 0.406: v50.01,6.19 48.18,4.37 35.24,4.37 33.73,5.87 31.11,5.87 27.3,2.06 JP3.11
PIXEL_FRONT1  (via drill 0.51)
  Top 0.406: JP16.P1 51.27,27.34 v50.01,26.08
  Bottom 0.406: v50.01,26.08 48.18,24.25 35.24,24.25 33.73,25.76 31.11,25.76 27.3,21.95 JP11.11
PIXEL_FRONT2  (via drill 0.51)
  Top 0.406: JP24.P1 51.27,47.23 v50.01,45.97
  Bottom 0.406: v50.01,45.97 48.18,44.14 35.24,44.14 33.73,45.65 31.11,45.65 27.3,41.84 JP19.11
PIXEL_FRONT3  (via drill 0.51)
  Top 0.406: JP32.P1 51.27,67.11 v50.01,65.86
  Bottom 0.406: v50.01,65.86 48.18,64.03 35.24,64.03 33.73,65.54 31.11,65.54 27.3,61.73 JP27.11
RESP  (via drill 0.36)
  Top 0.305: JP8.P8 JP7.P1 61.75,11.44 v61.75,14.92
  Bottom 0.305: JP2.11 29.34,15.24 36.51,15.24 38.42,17.14 59.53,17.14 v61.75,14.92
RESP1  (via drill 0.36)
  Top 0.305: JP16.P8 JP15.P1 61.75,31.33 v61.75,34.81
  Bottom 0.305: JP10.11 29.34,35.13 36.51,35.13 38.42,37.03 59.53,37.03 v61.75,34.81
RESP2  (via drill 0.36)
  Top 0.305: JP24.P8 JP23.P1 61.75,51.22 v61.75,54.7
  Bottom 0.305: JP18.11 29.34,55.02 36.51,55.02 38.42,56.92 59.53,56.92 v61.75,54.7
RESP3  (via drill 0.36)
  Top 0.305: JP32.P8 JP31.P1 61.75,71.11 v61.75,74.59
  Bottom 0.305: JP26.11 29.34,74.91 36.51,74.91 38.42,76.81 59.53,76.81 v61.75,74.59
RESV  (via drill 0.36)
  Top 0.305: JP8.P6 JP7.P3 58.74,11.43 v58.74,14.92
  Bottom 0.305: JP2.9 25.21,14.29 37.78,14.29 39.69,16.19 57.47,16.19 v58.74,14.92
RESV1  (via drill 0.36)
  Top 0.305: JP16.P6 JP15.P3 58.74,31.32 v58.74,34.81
  Bottom 0.305: JP10.9 25.21,34.18 37.78,34.18 39.69,36.08 57.47,36.08 v58.74,34.81
RESV2  (via drill 0.36)
  Top 0.305: JP24.P6 JP23.P3 58.74,51.21 v58.74,54.7
  Bottom 0.305: JP18.9 25.21,54.06 37.78,54.06 39.69,55.97 57.47,55.97 v58.74,54.7
RESV3  (via drill 0.36)
  Top 0.305: JP32.P6 JP31.P3 58.74,71.09 v58.74,74.59
  Bottom 0.305: JP26.9 25.21,73.95 37.78,73.95 39.69,75.86 57.47,75.86 v58.74,74.59
SPI_CS  (via drill 0.36)
  Top 0.305: 75.97,3.25 U3.P4 75.25,3.81 75.25,7.78 v74.77,8.26
  Bottom 0.254: 9.29,15.8 9.76,15.8
  Bottom 0.305: v74.77,8.26 74.77,13.18 73.82,14.13 40.96,14.13 39.69,12.86 15.84,12.86 12.91,15.8 9.76,15.8 | JP2.3 7.02,17.27 8.49,15.8 9.29,15.8
SPI_CS1  (via drill 0.36)
  Top 0.305: 75.97,23.14 U6.P4 75.97,22.98 75.25,23.7 75.25,27.67 v74.77,28.14
  Bottom 0.254: 9.29,35.68 9.76,35.68
  Bottom 0.305: v74.77,28.14 74.77,33.06 73.82,34.02 40.96,34.02 39.69,32.75 15.84,32.75 12.91,35.68 9.76,35.68 | JP10.3 7.02,37.16 8.49,35.68 9.29,35.68
SPI_CS2  (via drill 0.36)
  Top 0.305: 75.97,43.02 U9.P4 75.97,42.87 75.25,43.59 75.25,47.55 v74.77,48.03
  Bottom 0.254: 9.29,55.57 9.76,55.57
  Bottom 0.305: v74.77,48.03 74.77,52.95 73.82,53.91 40.96,53.91 39.69,52.63 15.84,52.63 12.91,55.57 9.76,55.57 | JP18.3 7.02,57.05 8.49,55.57 9.29,55.57
SPI_CS3  (via drill 0.36)
  Top 0.305: 75.97,62.91 U12.P4 75.97,62.76 75.25,63.48 75.25,67.44 v74.77,67.92
  Bottom 0.254: 9.29,75.46 9.76,75.46
  Bottom 0.305: v74.77,67.92 74.77,72.84 73.82,73.79 40.96,73.79 39.69,72.52 15.84,72.52 12.91,75.46 9.76,75.46 | JP26.3 7.02,76.94 8.49,75.46 9.29,75.46
SPI_MISO  (via drill 0.36)
  Top 0.305: v71.75,8.26 71.47,7.97 U3.P1
  Bottom 0.305: JP2.1 2.1,17.27 5.4,13.97 5.4,13.02 6.83,11.59 10.95,11.59 11.27,11.91 40.96,11.91 42.23,13.18 70.64,13.18 71.75,12.06 v71.75,8.26
SPI_MISO1  (via drill 0.36)
  Top 0.305: v71.75,28.14 71.47,27.86 U6.P1
  Bottom 0.305: JP10.1 2.1,37.16 5.4,33.86 5.4,32.91 6.83,31.48 10.95,31.48 11.27,31.79 40.96,31.79 42.23,33.06 70.64,33.06 71.75,31.95 v71.75,28.14
SPI_MISO2  (via drill 0.36)
  Top 0.305: v71.75,48.03 71.47,47.74 U9.P1
  Bottom 0.305: JP18.1 2.1,57.05 5.4,53.75 5.4,52.79 6.83,51.37 10.95,51.37 11.27,51.68 40.96,51.68 42.23,52.95 70.64,52.95 71.75,51.84 v71.75,48.03
SPI_MISO3  (via drill 0.36)
  Top 0.305: v71.75,67.92 71.47,67.63 U12.P1
  Bottom 0.305: JP26.1 2.1,76.94 5.4,73.64 5.4,72.68 6.83,71.25 10.95,71.25 11.27,71.57 40.96,71.57 42.23,72.84 70.64,72.84 71.75,71.73 v71.75,67.92
SPI_MOSI  (via drill 0.36)
  Top 0.305: 73.03,3.08 U3.P2 72.97,7.96 v73.26,8.26
  Bottom 0.305: JP2.2 5.59,15.88 7.3,15.88 8.26,14.92 8.26,12.54 8.73,12.06 10.64,12.06 10.95,12.38 40.32,12.38 41.59,13.65 72.71,13.65 73.26,13.1 v73.26,8.26
SPI_MOSI1  (via drill 0.36)
  Top 0.305: 73.03,22.96 U6.P2 72.97,27.85 v73.26,28.14
  Bottom 0.305: JP10.2 5.59,35.76 7.3,35.76 8.26,34.81 8.26,32.43 8.73,31.95 10.64,31.95 10.95,32.27 40.32,32.27 41.59,33.54 72.71,33.54 73.26,32.98 v73.26,28.14
SPI_MOSI2  (via drill 0.36)
  Top 0.305: 73.03,42.85 U9.P2 72.97,47.74 v73.26,48.03
  Bottom 0.305: JP18.2 5.59,55.65 7.3,55.65 8.26,54.7 8.26,52.32 8.73,51.84 10.64,51.84 10.95,52.16 40.32,52.16 41.59,53.43 72.71,53.43 73.26,52.87 v73.26,48.03
SPI_MOSI3  (via drill 0.36)
  Top 0.305: 73.03,62.74 U12.P2 72.97,67.62 v73.26,67.92
  Bottom 0.305: JP26.2 5.59,75.54 7.3,75.54 8.26,74.59 8.26,72.21 8.73,71.73 10.64,71.73 10.95,72.05 40.32,72.05 41.59,73.32 72.71,73.32 73.26,72.76 v73.26,67.92
SPI_SCK  (via drill 0.36)
  Top 0.305: v74.45,4.76 74.45,3.09 U3.P3
  Bottom 0.305: JP3.2 7.19,4.52 23.89,4.52 28.18,8.81 42.55,8.81 43.26,8.1 44.45,8.1 45.88,9.53 64.29,9.53 65.09,10.32 65.09,12.06 65.72,12.7 70.01,12.7 70.48,12.22 70.48,7.78 73.5,4.76 v74.45,4.76
SPI_SCK1  (via drill 0.36)
  Top 0.305: v74.45,24.65 74.45,22.98 U6.P3
  Bottom 0.305: JP11.2 7.19,24.41 23.89,24.41 28.18,28.7 42.55,28.7 43.26,27.98 44.45,27.98 45.88,29.41 64.29,29.41 65.09,30.21 65.09,31.95 65.72,32.59 70.01,32.59 70.48,32.11 70.48,27.67 73.5,24.65 v74.45,24.65
SPI_SCK2  (via drill 0.36)
  Top 0.305: v74.45,44.54 74.45,42.87 U9.P3
  Bottom 0.305: JP19.2 7.19,44.3 23.89,44.3 28.18,48.59 42.55,48.59 43.26,47.87 44.45,47.87 45.88,49.3 64.29,49.3 65.09,50.09 65.09,51.84 65.72,52.48 70.01,52.48 70.48,52 70.48,47.55 73.5,44.54 v74.45,44.54
SPI_SCK3  (via drill 0.36)
  Top 0.305: v74.45,64.43 74.45,62.75 U12.P3
  Bottom 0.305: JP27.2 7.19,64.19 23.89,64.19 28.18,68.47 42.55,68.47 43.26,67.76 44.45,67.76 45.88,69.19 64.29,69.19 65.09,69.98 65.09,71.73 65.72,72.36 70.01,72.36 70.48,71.89 70.48,67.44 73.5,64.43 v74.45,64.43
TS_PROG
  Top 0.406: JP4.4 3.19,6.99 C9.1 6.66,8.88 PROGRAM.A' PROGRAM.A
TS_PROG1
  Top 0.406: JP12.4 3.19,26.87 C19.1 6.66,28.76 PROGRAM1.A' PROGRAM1.A
TS_PROG2
  Top 0.406: JP20.4 3.19,46.76 C29.1 6.66,48.65 PROGRAM2.A' PROGRAM2.A
TS_PROG3
  Top 0.406: JP28.4 3.19,66.65 C39.1 6.66,68.54 PROGRAM3.A' PROGRAM3.A
TS_RESET
  Top 0.406: JP4.5 5.07,4.45 C8.1 6.66,4.43 RESET.A' RESET.A
TS_RESET1
  Top 0.406: JP12.5 5.07,24.33 C18.1 6.66,24.32 RESET1.A' RESET1.A
TS_RESET2
  Top 0.406: JP20.5 5.07,44.22 C28.1 6.66,44.21 RESET2.A' RESET2.A
TS_RESET3
  Top 0.406: JP28.5 5.07,64.11 C38.1 6.66,64.09 RESET3.A' RESET3.A
UART1_RXD  (via drill 0.36)
  Top 0.254: 71.44,15.97 U3.P14
  Top 0.305: v71.44,17.46 71.44,15.97
  Bottom 0.279: 34.77,18.26 35.08,18.26
  Bottom 0.305: JP2.13 33.37,18.26 34.77,18.26 | 35.08,18.26 70.64,18.26 v71.44,17.46
UART1_RXD1  (via drill 0.36)
  Top 0.254: 71.44,35.86 U6.P14
  Top 0.305: v71.44,37.35 71.44,35.86
  Bottom 0.279: 34.77,38.14 35.08,38.14
  Bottom 0.305: JP10.13 33.37,38.14 34.77,38.14 | 35.08,38.14 70.64,38.14 v71.44,37.35
UART1_RXD2  (via drill 0.36)
  Top 0.254: 71.44,55.75 U9.P14
  Top 0.305: v71.44,57.24 71.44,55.75
  Bottom 0.279: 34.77,58.03 35.08,58.03
  Bottom 0.305: JP18.13 33.37,58.03 34.77,58.03 | 35.08,58.03 70.64,58.03 v71.44,57.24
UART1_RXD3  (via drill 0.36)
  Top 0.254: 71.44,75.64 U12.P14
  Top 0.305: v71.44,77.13 71.44,75.64
  Bottom 0.279: 34.77,77.92 35.08,77.92
  Bottom 0.305: JP26.13 33.37,77.92 34.77,77.92 | 35.08,77.92 70.64,77.92 v71.44,77.13
UART1_TXD  (via drill 0.36)
  Top 0.305: v72.95,17.46 72.95,16 U3.P13
  Bottom 0.305: JP2.12 31.15,15.72 36.04,15.72 37.94,17.62 70.01,17.62 70.96,16.67 71.91,16.67 72.71,17.46 v72.95,17.46
UART1_TXD1  (via drill 0.36)
  Top 0.305: v72.95,37.35 72.95,35.88 U6.P13
  Bottom 0.305: JP10.12 31.15,35.6 36.04,35.6 37.94,37.51 70.01,37.51 70.96,36.56 71.91,36.56 72.71,37.35 v72.95,37.35
UART1_TXD2  (via drill 0.36)
  Top 0.305: v72.95,57.24 72.95,55.77 U9.P13
  Bottom 0.305: JP18.12 31.15,55.49 36.04,55.49 37.94,57.4 70.01,57.4 70.96,56.45 71.91,56.45 72.71,57.24 v72.95,57.24
UART1_TXD3  (via drill 0.36)
  Top 0.305: v72.95,77.13 72.95,75.66 U12.P13
  Bottom 0.305: JP26.12 31.15,75.38 36.04,75.38 37.94,77.29 70.01,77.29 70.96,76.33 71.91,76.33 72.71,77.13 v72.95,77.13
VBAT
  Top 0.305: U2.P2 21.32,4.24 22.23,3.33 24.92,3.33 30.48,8.89 31.09,8.89 U1.P3
  Top 0.813: U1.P3 31.24,10.05 31.67,10.48 36.37,10.48 PTC.2 37.52,11.62 J1.P2
VBAT1
  Top 0.305: U5.P2 21.32,24.13 22.23,23.22 24.92,23.22 30.48,28.78 31.09,28.78 U4.P3
  Top 0.813: U4.P3 31.24,29.94 31.67,30.37 36.37,30.37 PTC1.2 37.52,31.51 J2.P2
VBAT2
  Top 0.305: U8.P2 21.32,44.02 22.23,43.11 24.92,43.11 30.48,48.67 31.09,48.67 U7.P3
  Top 0.813: U7.P3 31.24,49.83 31.67,50.25 36.37,50.25 PTC2.2 37.52,51.4 J3.P2
VBAT3
  Top 0.305: U11.P2 21.32,63.91 22.23,63 24.92,63 30.48,68.56 31.09,68.56 U10.P3
  Top 0.813: U10.P3 31.24,69.72 31.67,70.14 36.37,70.14 PTC3.2 37.52,71.29 J4.P2
VCCIO  (via drill 0.84)
  Top 0.305: U2.P3 22.41,4.74 C3.2 | LED3.A 67.35,9.31 C5.1
  Top 0.406: LED2.A 12.5,10.28 14.06,11.84 LDO1.3 20.73,11.84 19.37,10.48 19.37,6.67 20,6.03 21.27,6.03 22.43,4.87 C3.2 | 80.47,15.7 U3.P8
  Top 0.61: 80.47,15.7 79.69,14.92 74.93,14.92 73.03,13.02 64.93,13.02 v63.98,12.06 | JP7.P6 JP8.P3 54.27,6.22 55.24,5.24 62.23,5.24 63.52,6.53 C10.1 63.52,11.61 v63.98,12.06 | v63.98,12.06 64.6,12.06 C5.1
  Top 0.813: LDO1.3 23.89,11.84 C2.1 24.33,12.28 C7.1 27.09,12.28 28.02,11.35 v28.02,10.95
  Bottom 0.813: v28.02,10.95 41.27,10.95 42.39,12.06 v63.98,12.06
VCCIO1  (via drill 0.84)
  Top 0.305: U5.P3 22.41,24.63 C13.2 | LED6.A 67.35,29.2 C15.1
  Top 0.406: LED5.A 12.5,30.16 14.06,31.73 LDO2.3 20.73,31.73 19.37,30.37 19.37,26.56 20,25.92 21.27,25.92 22.43,24.76 C13.2 | 80.47,35.59 U6.P8
  Top 0.61: 80.47,35.59 79.69,34.81 74.93,34.81 73.03,32.91 64.93,32.91 v63.98,31.95 | JP15.P6 JP16.P3 54.27,26.11 55.24,25.13 62.23,25.13 63.52,26.42 C20.1 63.52,31.5 v63.98,31.95 | v63.98,31.95 64.6,31.95 C15.1
  Top 0.813: LDO2.3 23.89,31.73 C12.1 24.33,32.17 C17.1 27.09,32.17 28.02,31.24 v28.02,30.84
  Bottom 0.813: v28.02,30.84 41.27,30.84 42.39,31.95 v63.98,31.95
VCCIO2  (via drill 0.84)
  Top 0.305: U8.P3 22.41,44.52 C23.2 | LED9.A 67.35,49.08 C25.1
  Top 0.406: LED8.A 12.5,50.05 14.06,51.61 LDO3.3 20.73,51.61 19.37,50.25 19.37,46.44 20,45.81 21.27,45.81 22.43,44.65 C23.2 | 80.47,55.47 U9.P8
  Top 0.61: 80.47,55.47 79.69,54.7 74.93,54.7 73.03,52.79 64.93,52.79 v63.98,51.84 | JP23.P6 JP24.P3 54.27,45.99 55.24,45.02 62.23,45.02 63.52,46.31 C30.1 63.52,51.39 v63.98,51.84 | v63.98,51.84 64.6,51.84 C25.1
  Top 0.813: LDO3.3 23.89,51.61 C22.1 24.33,52.06 C27.1 27.09,52.06 28.02,51.13 v28.02,50.73
  Bottom 0.813: v28.02,50.73 41.27,50.73 42.39,51.84 v63.98,51.84
VCCIO3  (via drill 0.84)
  Top 0.305: U11.P3 22.41,64.41 C33.2 | LED12.A 67.35,68.97 C35.1
  Top 0.406: LED11.A 12.5,69.94 14.06,71.5 LDO4.3 20.73,71.5 19.37,70.14 19.37,66.33 20,65.7 21.27,65.7 22.43,64.54 C33.2 | 80.47,75.36 U12.P8
  Top 0.61: 80.47,75.36 79.69,74.59 74.93,74.59 73.03,72.68 64.93,72.68 v63.98,71.73 | JP31.P6 JP32.P3 54.27,65.88 55.24,64.9 62.23,64.9 63.52,66.2 C40.1 63.52,71.28 v63.98,71.73 | v63.98,71.73 64.6,71.73 C35.1
  Top 0.813: LDO4.3 23.89,71.5 C32.1 24.33,71.94 C37.1 27.09,71.94 28.02,71.02 v28.02,70.62
  Bottom 0.813: v28.02,70.62 41.27,70.62 42.39,71.73 v63.98,71.73
VIN
  Top 0.813: J1.P4 41.27,12.38 | 41.27,12.38 42.55,13.65 44.77,13.65 45.4,13.02 45.4,7.3 42.55,4.45 39.69,4.45 39.05,5.08 36.83,5.08 36.51,4.76 36.51,3.37 JP3.14 | 41.27,12.38 40.01,13.65 37.78,13.65 35.88,11.75 31.51,11.75 30.16,10.4 30.16,9.68 27.3,6.83 26.09,6.83 C6.1 24.33,6.77 C1.1 23.89,7.21 LDO1.1
VIN1
  Top 0.813: J2.P4 41.27,32.27 | 41.27,32.27 42.55,33.54 44.77,33.54 45.4,32.91 45.4,27.19 42.55,24.33 39.69,24.33 39.05,24.97 36.83,24.97 36.51,24.65 36.51,23.25 JP11.14 | 41.27,32.27 40.01,33.54 37.78,33.54 35.88,31.64 31.51,31.64 30.16,30.29 30.16,29.57 27.3,26.71 26.09,26.71 C16.1 24.33,26.66 C11.1 23.89,27.1 LDO2.1
VIN2
  Top 0.813: J3.P4 41.27,52.16 | 41.27,52.16 42.55,53.43 44.77,53.43 45.4,52.79 45.4,47.08 42.55,44.22 39.69,44.22 39.05,44.86 36.83,44.86 36.51,44.54 36.51,43.14 JP19.14 | 41.27,52.16 40.01,53.43 37.78,53.43 35.88,51.52 31.51,51.52 30.16,50.17 30.16,49.46 27.3,46.6 26.09,46.6 C26.1 24.33,46.55 C21.1 23.89,46.99 LDO3.1
VIN3
  Top 0.813: J4.P4 41.27,72.05 | 41.27,72.05 42.55,73.32 44.77,73.32 45.4,72.68 45.4,66.97 42.55,64.11 39.69,64.11 39.05,64.75 36.83,64.75 36.51,64.43 36.51,63.03 JP27.14 | 41.27,72.05 40.01,73.32 37.78,73.32 35.88,71.41 31.51,71.41 30.16,70.06 30.16,69.35 27.3,66.49 26.09,66.49 C36.1 24.33,66.44 C31.1 23.89,66.88 LDO4.1
VUSB
  Top 0.406: LED1.A 30.05,4.01 31.43,5.4
  Top 0.813: JP5.1 31.43,5.4 31.24,5.58 U1.P4
VUSB1
  Top 0.406: LED4.A 30.05,23.9 31.43,25.29
  Top 0.813: JP13.1 31.43,25.29 31.24,25.47 U4.P4
VUSB2
  Top 0.406: LED7.A 30.05,43.79 31.43,45.17
  Top 0.813: JP21.1 31.43,45.17 31.24,45.36 U7.P4
VUSB3
  Top 0.406: LED10.A 30.05,63.68 31.43,65.06
  Top 0.813: JP29.1 31.43,65.06 31.24,65.25 U10.P4

## Text on the board
tPlace: EYE | LED | 498 Glasses Teensy3 Breakout | + | ON | OFF | by Justin Paupore and Joe Romeo | PROG | PWR | + | - | RESET | CHG | BT | v1.0 | FRONT | EYE | LED | 498 Glasses Teensy3 Breakout | + | ON | OFF | by Justin Paupore and Joe Romeo | PROG | PWR | + | - | RESET | CHG | BT | v1.0 | FRONT | EYE | LED | 498 Glasses Teensy3 Breakout | + | ON | OFF | by Justin Paupore and Joe Romeo | PROG | PWR | + | - | RESET | CHG | BT | v1.0 | FRONT | EYE | LED | 498 Glasses Teensy3 Breakout | + | by Justin Paupore and Joe Romeo | ON | OFF | PROG | PWR | + | - | RESET | CHG | BT | v1.0 | FRONT
_tNames: C4 | R5 | J1 | Q1 | Q3 | JP6 | C2 | C7 | U3 | LED2 | C10 | C5 | C9 | PTC | LED3 | PROGRAM | LDO1 | C1 | R1 | C6 | R2 | Q2 | R4 | C8 | R3 | C3 | RESET | U2 | LED1 | JP1 | JP8 | C4 | R5 | J1 | Q1 | Q3 | JP6 | C2 | C7 | LED2 | U3 | C10 | C5 | C9 | PTC | PROGRAM | LED3 | LDO1 | C1 | C6 | R1 | R2 | Q2 | R4 | C8 | R3 | C3 | RESET | U2 | LED1 | JP1 | JP8 | C4 | J1 | R5 | Q1 | Q3 | JP6 | C2 | C7 | LED2 | U3 | C10 | C5 | C9 | PTC | PROGRAM | LED3 | LDO1 | C1 | C6 | R1 | R2 | Q2 | R4 | C8 | R3 | C3 | RESET | U2 | LED1 | JP1 | JP8 | C4 | J1 | R5 | Q1 | Q3 | JP6 | C2 | C7 | LED2 | U3 | C10 | C5 | C9 | PTC | PROGRAM | LED3 | LDO1 | C1 | C6 | R1 | R2 | Q2 | R4 | C8 | R3 | C3 | RESET | U2 | LED1 | JP1 | JP8